# Altium PCB Neon-Demon-revB.PcbDoc
Units mm, origin at the board's own origin, x right, y up, seen from the top; angles counter-clockwise.
Board outline 24.14 x 27.04 mm, 2 copper layers (Top Layer, Bottom Layer), stack 1.071 mm thick; 10 components, 7 nets, 45 pads, 8 vias.
Unrouted connection lines stored in the file: 1.
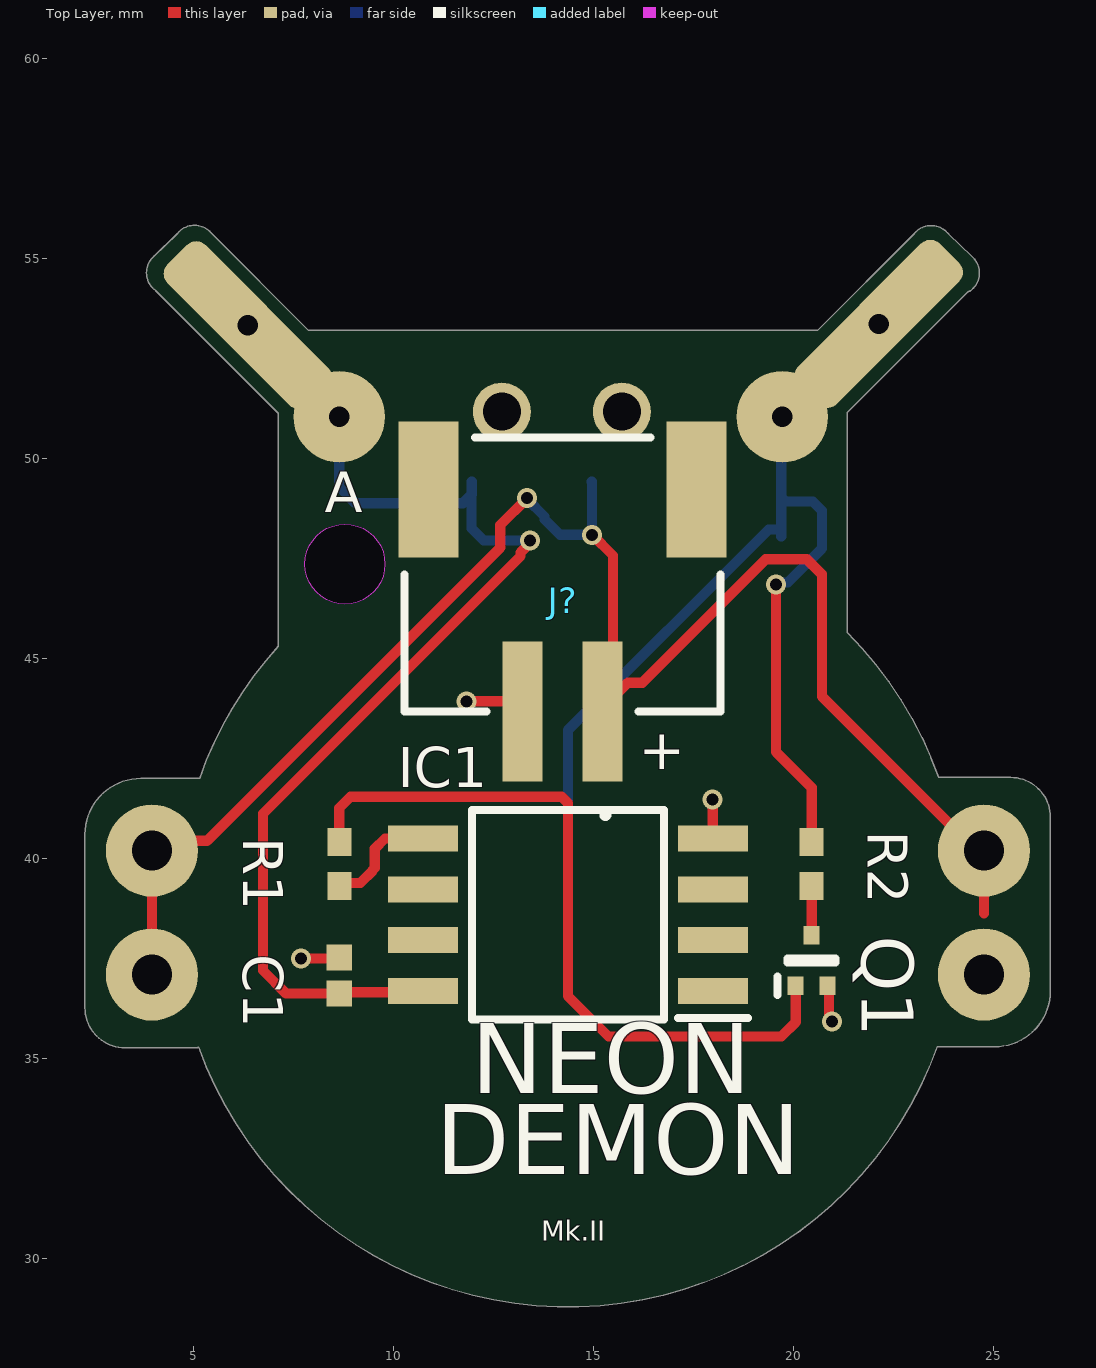
[diagram p0: Top Layer view]
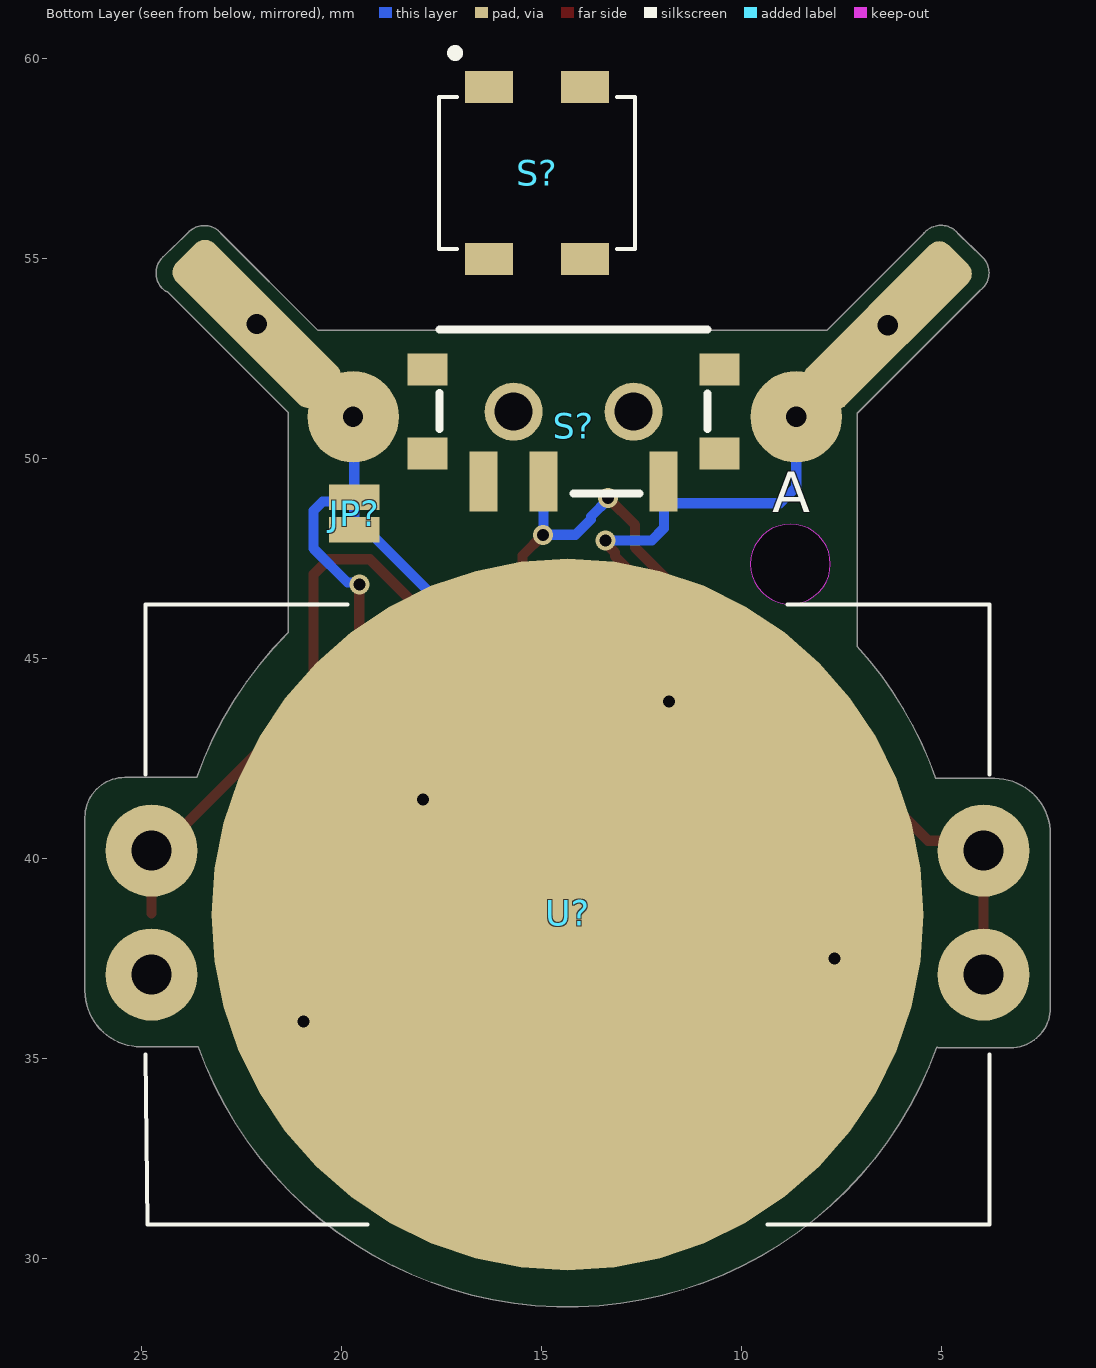
[diagram p1: Bottom Layer view, seen from below]
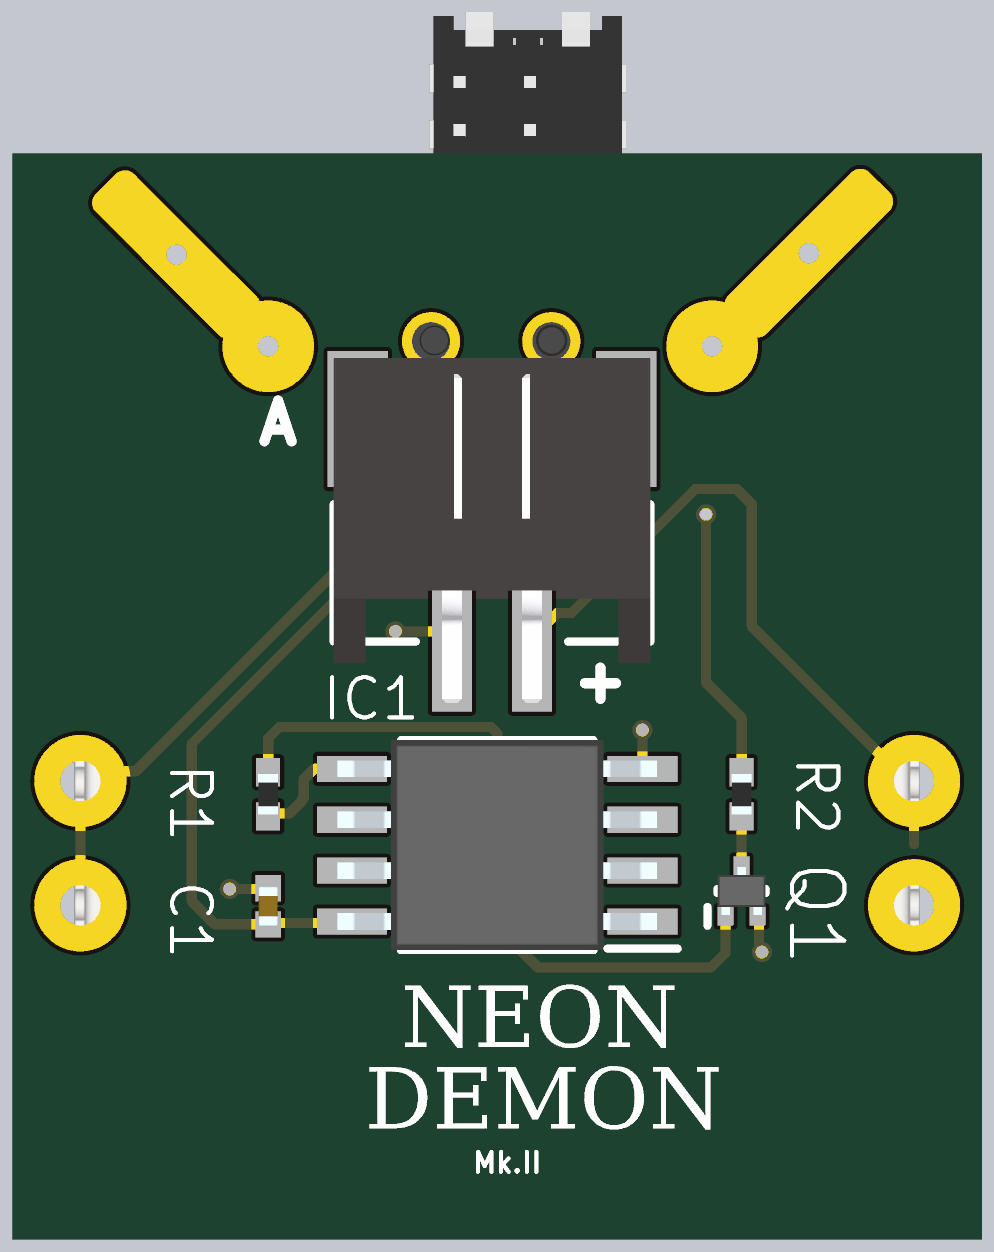
[diagram p2: 3D render of the assembled board from above, using the file's embedded part models]
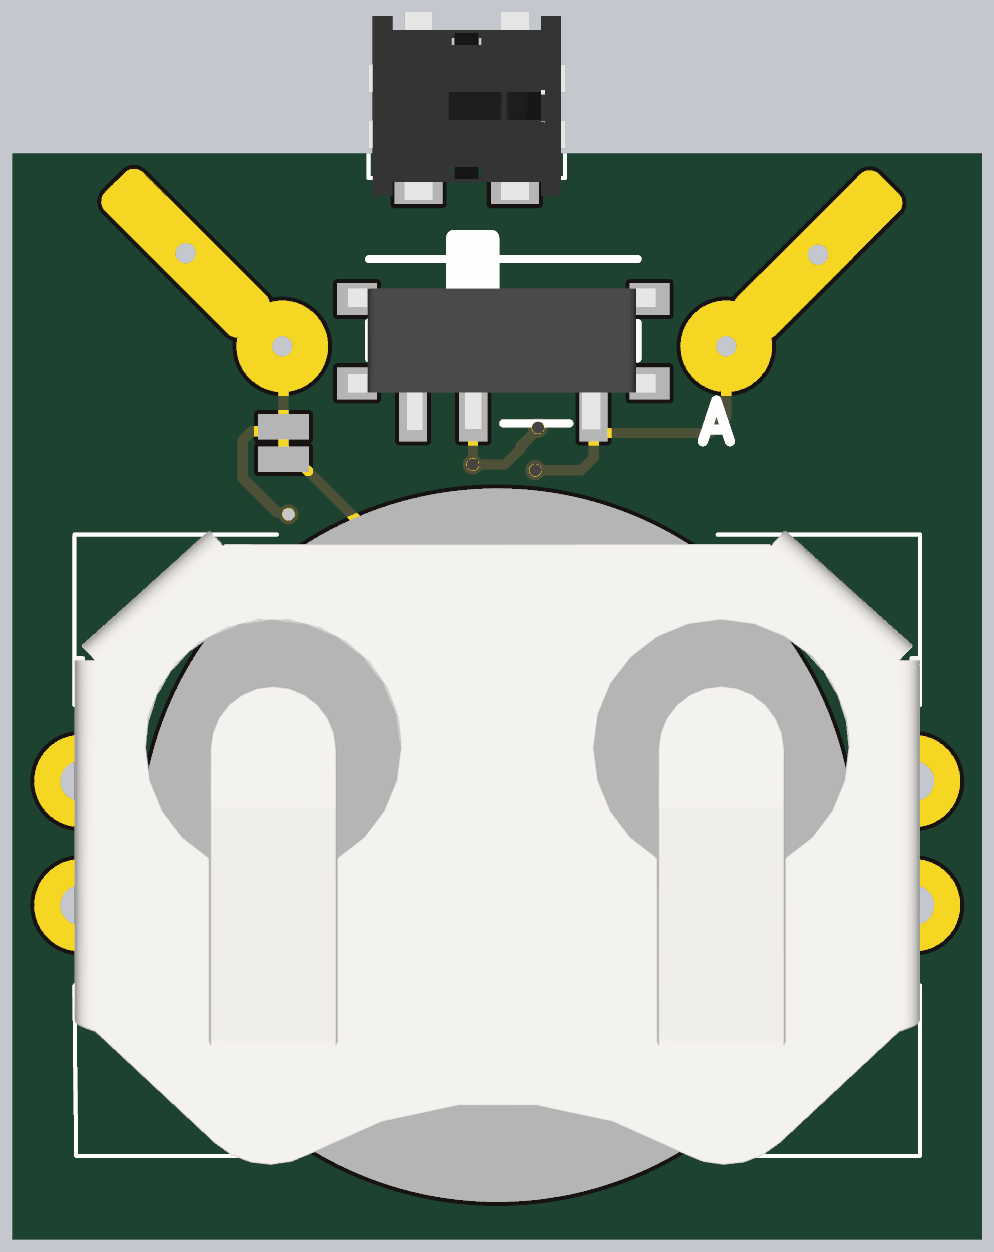
[diagram p3: 3D render of the assembled board from below, using the file's embedded part models]

## Layer stack, top to bottom
Top Solder: solder mask 0.0102, Solder Resist, Dk 3.5
Top Layer: signal copper 0.0356
Dielectric 1: dielectric 1, FR-4, Dk 4.8
Bottom Layer: signal copper 0.0356
Bottom Solder: solder mask 0.0102, Solder Resist, Dk 3.5

## Board outline
2.57,35.575 cw(c3.274,36.278) 2.279,36.278 2.279,40.618 cw(c3.677,40.618) 3.677,42.016 5.143,42.016 cw(c14.388,38.742) 7.113,45.319 cw(c7.239,45.339) 7.112,45.339 7.112,51.143 4.047,54.208 cw(c4.114,54.317) 4.038,54.214 cw(c4.365,54.656) 3.999,55.065 4.586,55.629 cw(c5.02,55.293) 5.432,55.657 cw(c5.337,55.573) 5.447,55.636 7.869,53.213 20.593,53.213 23.009,55.629 cw(c23.12,55.566) 23.024,55.65 cw(c23.436,55.286) 23.87,55.623 24.457,55.059 cw(c24.091,54.649) 24.641,54.649 cw(c24.091,54.649) 24.419,54.208 cw(c24.343,54.31) 24.355,54.183 21.336,51.165 21.336,45.662 cw(c14.388,38.742) 23.624,42.037 25.422,42.037 cw(c25.422,41.043) 26.125,41.746 cw(c25.422,41.043) 26.416,41.043 26.416,36.703 cw(c25.019,36.703) 25.019,35.306 23.585,35.306 cw(c14.351,38.608) 5.121,35.293 cw(c5.074,35.411) 5.074,35.284 3.274,35.284 cw(c3.274,36.278)
cut-out: 8.779,46.371 cw(c8.779,47.371) 7.779,47.371 cw(c8.779,47.371) 8.779,48.371 cw(c8.779,47.371) 9.779,47.371 cw(c8.779,47.371)

## Design rules (kind name [scope] priority, off if disabled: settings)
Clearance [All] p1: gap=0.254 ignorepadtopadclearanceinfootprint=FALSE except(0: Arc-Hole Track-Hole SMDPad-Hole THPad-Hole Via-Hole Fill-Hole Poly-Hole Region-Hole Text-Hole)
PolygonConnect [All] p1: connectstyle=Relief reliefconductorwidth=0.254 reliefentries=4 polygonreliefangle="90 Angle" airgapwidth=0.254
RoutingVias [All] p1: holewidth=0.711 width=1.27 viastyle="Through Hole" minholewidth=0.1 minwidth=0.1 maxholewidth=0.711 maxwidth=1.27
SolderMaskExpansion [All] p1: expansion=0.102 istentingtop=FALSE
Width [All] p1: maxlimit=0.254 minlimit=0.254 preferedwidth=0.254
30 further rules are at their usual default settings.

## Classes and differential pairs
component class Neon-Demon-revB: C1 IC1 J? JP? Q1 R1 R2 S? U?

## Components (designator, comment, footprint, x,y, rotation, side; value= is the part's Value field where it differs from the comment)
C1 "0402YC104MAT2A" CAPC1005X56N 8.636,37.084 r270 top
IC1 "ATTINY85-20SUR" SOIC127P798X216-8N 14.351,38.608 r180 top
J? "1769" 1769 14.22,43.688 r180 top
JP? "Normally open jumper    This jumper has two pads in close proximity to each other. Apply solder to close the connection.   Round pads are easier to solder for beginners, but are a lot larger.   SparkFun Product that uses the round pads:  SparkFun EL Sequencer" SMT-JUMPER_2_NO_SILK 19.685,48.641 r90 bottom
Q1 "MMBT2222AM3T5G" SOTFL40P120X55-3N 20.447,37.465 r90 top
R1 "CPF0402B100KE" RESC1005X35N 8.636,39.878 r90 top
R2 "CPF0402B100KE" RESC1005X35N 20.447,39.878 r90 top
S? "461011220101" 461011220101 15.113,57.15 r180 bottom
S? "CUS-12TB" CUS-12B 14.2,51.181 r0 bottom
U? "BAT-HLD-001-THM" BATHLD001THM 14.351,38.608 r0 bottom

## Footprints (in the part's own frame and the unit in brackets; to place one, negate y for a bottom-side part, rotate by r counter-clockwise, add the part's x,y. Pads: shape width x height; smd on the part's side, far side on the other; paste and mask are expansions set on the pad)
1769 [mm]
  rect 1x3.5 smd: 1(-1,0) 2(1,0)
  rect 1.5x3.4 smd: 3(-3.35,-5.55) 4(3.35,-5.55)
  silkscreen extent -3.95,-6.85 3.95,2.63, body extent -3.95,-7.07 3.95,1.53, height 4.8
461011220101 [mm]
  rect 1.2x0.8 smd: 1(-1.2,2.15) 2(1.2,2.15) 3(-1.2,-2.15) 4(1.2,-2.15)
  silkscreen extent -2.45,-1.9 2.45,3.05, body extent -2.45,-2.45 2.45,2.25, height 3.8
BATHLD001THM [mm]
  round 2.3 hole 1: 1(-10.4,1.5) 2(-10.4,-1.6) 3(10.4,-1.6) 4(10.4,1.5)
  round 17.8 smd: 5(0,0)
  silkscreen extent -10.55,-7.75 10.55,7.75, body extent -10.54,-7.85 10.54,7.98, height 4.29
CAPC1005X56N [mm]
  rect 0.65x0.64 smd: 1(-0.45,0) 2(0.45,0)
  body extent -0.5,-0.25 0.5,0.25, height 0.56
CUS-12B [mm]
  rect 0.7x1.5 smd: 1(-2.25,1.75) 2(0.75,1.75) 3(2.25,1.75)
  rect 1x0.8 smd: 4(3.65,1.05) 5(3.65,-1.05) 6(-3.65,-1.05) 7(-3.65,1.05)
  round 1.45 hole 0.95: 8(-1.5,0) 9(1.5,0)
  silkscreen extent -3.35,-2.05 3.35,2.05, body extent -3.8,-2.78 3.88,2.21, height 1.47
RESC1005X35N [mm]
  rect 0.7x0.6 smd: 1(-0.55,0) 2(0.55,0)
  body extent -0.5,-0.25 0.5,0.25, height 0.35
SMT-JUMPER_2_NO_SILK [mil]
  rect 25x50 smd paste+0: 1(-16,0) 2(16,0)
SOIC127P798X216-8N [mm]
  rect 1.75x0.65 smd: 1(-3.625,1.905) 2(-3.625,0.635) 3(-3.625,-0.635) 4(-3.625,-1.905) 5(3.625,-1.905) 6(3.625,-0.635) 7(3.625,0.635) 8(3.625,1.905)
  silkscreen extent -4.5,-2.62 2.4,2.62, body extent -3.99,-2.62 3.99,2.62, height 2.16
SOTFL40P120X55-3N [mm]
  rect 0.465x0.4 smd: 1(-0.632,0.4) 2(-0.632,-0.4) 3(0.632,0)
  silkscreen extent -0.86,-0.6 0.05,0.85, body extent -0.6,-0.6 0.6,0.6, height 0.55

## Part data
C1: "Capacitor", Manufacturer_Name=AVX, Mouser Part Number=581-0402YC104MAT2A, Datasheet Link=http://www.mouser.com/catalog/supplier/library/pdf/AVXSurfaceMountCeramic.pdf, Height=0.56mm, Manufacturer_Part_Number=0402YC104MAT2A, Mouser Price/Stock=https://www.mouser.co.uk/ProductDetail/AVX/0402YC104MAT2A?qs=O2%2FeDh0sX9yiCaLwpXy1bw%3D%3D
IC1: "Integrated Circuit", Manufacturer_Name=Microchip, Mouser Part Number=556-ATTINY85-20SUR, Arrow Part Number=ATTINY85-20SUR, Arrow Price/Stock=https://www.arrow.com/en/products/attiny85-20sur/microchip-technology?region=nac, Datasheet Link=http://ww1.microchip.com/downloads/en/DeviceDoc/Atmel-2586-AVR-8-bit-Microcontroller-ATtiny25-ATtiny45-ATtiny85_Datasheet.pdf, Height=2.16mm, Manufacturer_Part_Number=ATTINY85-20SUR, Mouser Price/Stock=https://www.mouser.co.uk/ProductDetail/Microchip-Technology/ATTINY85-20SUR?qs=6Dg1WZIWLC6UmR7J9f97hw%3D%3D
J?: "Connector", Manufacturer_Name=Adafruit, Mouser Part Number=485-1769, Arrow Part Number=1769, Arrow Price/Stock=https://www.arrow.com/en/products/1769/adafruit-industries?region=nac, Datasheet Link=https://cdn-shop.adafruit.com/datasheets/17311.pdf, Manufacturer_Part_Number=1769, Mouser Price/Stock=https://www.mouser.co.uk/ProductDetail/Adafruit/1769?qs=GURawfaeGuBbgoGtf2XstA%3D%3D
JP?: library part JUMPER-SMT_2_NO_SILK, Package=SMT-JUMPER_2_NO_SILK, DeviceName=_SILK, DeviceSetName=JUMPER-SMT_2_NO, GateName_1=G$1, LibraryName=SparkFun-Jumpers, SymbolName_1=SMT-JUMPER_2_NO
Q1: "Transistor BJT NPN", Manufacturer_Name=onsemi, Mouser Part Number=863-MMBT2222AM3T5G, Arrow Part Number=MMBT2222AM3T5G, Arrow Price/Stock=https://www.arrow.com/en/products/mmbt2222am3t5g/on-semiconductor?region=nac, Datasheet Link=http://www.onsemi.com/pub/Collateral/MMBT2222AM3-D.PDF, Height=0.55mm, Manufacturer_Part_Number=MMBT2222AM3T5G, Mouser Price/Stock=https://www.mouser.co.uk/ProductDetail/onsemi/MMBT2222AM3T5G?qs=N5dOQkml4H%252BwlTOlL9%2F4UA%3D%3D
R1 R2: "Resistor", Manufacturer_Name="TE Connectivity", Mouser Part Number=279-CPF0402B100KE, Arrow Part Number=CPF0402B100KE, Arrow Price/Stock=https://www.arrow.com/en/products/cpf0402b100ke/te-connectivity?region=nac, Datasheet Link=http://www.farnell.com/datasheets/1786775.pdf, Height=0.35mm, Manufacturer_Part_Number=CPF0402B100KE, Mouser Price/Stock=https://www.mouser.co.uk/ProductDetail/TE-Connectivity-Holsworthy/CPF0402B100KE?qs=CXI0wBT1M2h4W2Gm72yIGA%3D%3D
S?: "Switch", Manufacturer_Name="Wurth Elektronik", Mouser Part Number=710-461011220101, Datasheet Link=https://www.we-online.com/catalog/datasheet/461011220101.pdf, Height=3.8mm, Manufacturer_Part_Number=461011220101, Mouser Price/Stock=https://www.mouser.co.uk/ProductDetail/Wurth-Elektronik/461011220101?qs=wr8lucFkNMVAdVKd0FklHQ%3D%3D
S?: "Switch", Manufacturer_Name="Copal Electronics", Datasheet Link=http://www.nidec-copal-electronics.com/e/catalog/switch/cus.pdf, Manufacturer_Part_Number=CUS-12TB
U?: "Undefined or Miscellaneous", Manufacturer_Name="Linx Technologies", Mouser Part Number=712-BAT-HLD-001-THM, Datasheet Link="http://www.mouser.com/datasheet/2/238/BAT-HLD-001-THM Diagram-1175214.pdf", Height=4.2mm, Manufacturer_Part_Number=BAT-HLD-001-THM, Mouser Price/Stock=https://www.mouser.co.uk/ProductDetail/Linx-Technologies/BAT-HLD-001-THM?qs=Z0V%2FpEl%252BOGcluj3h2QTrDw%3D%3D

## Free pads (board coordinates)
  rrect50% 1.35x5 hole 0.508 rot 45: 1(6.35,53.34)
  round 2.286 hole 0.508: 1(8.636,51.054) 1(19.714,51.053)
  rrect50% 1.35x5 hole 0.508 rot 135: 1(22.125,53.376)

## Via types
v1: diameter 0.5, hole 0.3, Top Layer to Bottom Layer, tented both sides, 8 vias

## Nets (pads, with @x,y where several pads share a name; then routed paths per layer and width w, separated by ;. In a path a pad name is that pad's centre, name@x,y a point inside that pad or via, vN(x,y) a via of type N, cw(c..) or ccw(c..) an arc to the next point about the centre after c; other vN are vias at no path point)
GND: C1.1 IC1.4 J?.2 JP?.1 Q1.2 U?.5 | length 16.7
  Top Layer w0.254: v1(7.677,37.514) 8.616,37.514 C1.1 ; v1(11.811,43.942) 13.224,43.942 J?.2@13.478,43.688 ; v1(17.972,41.482) 17.972,40.517 IC1.4 ; Q1.2 20.882,36.798 20.882,36.081 20.955,36.008 v1(20.955,35.941)
  Bottom Layer w0.254: U?.5 14.351,43.218 19.367,48.235 JP?.1
LED_A: C1.2 IC1.8 pad.1@6.35,53.34 pad.1@8.636,51.054 S?.1@11.95,49.431 | length 25.9
  Top Layer w0.254: IC1.8 10.692,36.669 8.671,36.669 C1.2 7.308,36.634 6.731,37.211 6.731,41.134 13.17,47.573 13.17,47.665 13.402,47.897 v1(13.402,47.964)
  Bottom Layer w0.254: pad.1@8.636,51.054 8.636,49.298 9.039,48.895 11.727,48.895 S?.1@11.95,49.118 ; S?.1@11.95,49.431 S?.1@11.95,49.118 ; v1(13.402,47.964) 12.246,47.964 11.944,48.266 11.944,49.112 S?.1@11.95,49.118
LED_K: JP?.2 pad.1@19.714,51.053 pad.1@22.125,53.376 R2.2 | length 14.2
  Top Layer w0.254: v1(19.558,46.863) 19.558,42.672 20.449,41.781 R2.2@20.449,40.651
  Bottom Layer w0.254: v1(19.558,46.863) 19.605,46.91 19.852,46.91 20.701,47.759 20.701,48.71 20.478,48.933 19.799,48.933 JP?.2 19.685,51.024 pad.1@19.714,51.053 ; 19.685,48.069 pad.1@19.685,50.046
NetQ1_1: Q1.1 R1.2 | length 18.7
  Top Layer w0.254: R1.2 8.636,41.275 8.918,41.557 14.196,41.557 14.351,41.402 14.351,36.576 15.367,35.56 19.685,35.56 20.047,35.922 Q1.1
NetQ1_3: Q1.3 R2.1 | length 1.1
  Top Layer w0.254: Q1.3@20.447,38.227 R2.1
PWM: IC1.5 R1.1 | length 2.9
  Top Layer w0.254: R1.1 8.71,39.402 9.168,39.402 9.47,39.703 9.47,39.726 9.525,39.781 9.525,40.259 9.779,40.513 IC1.5
VBAT_RAW: J?.1 S?.2@14.95,49.431 U?.1 U?.2 U?.3 U?.4 | length 41.9
  Top Layer w0.254: U?.1 U?.2 4.197,40.454 5.333,40.454 12.662,47.783 12.662,48.349 v1(13.335,49.022) ; v1(14.961,48.105) 15.478,47.588 15.478,44.938 J?.1@15.478,43.688 ; J?.1@15.486,43.68 15.486,44.039 15.851,44.404 16.21,44.404 18.923,47.117 18.923,47.12 19.297,47.494 20.324,47.494 20.701,47.117 20.701,44.069 24.562,40.208 U?.3 24.751,38.639
  Bottom Layer w0.254: v1(13.335,49.022) 13.335,48.995 13.768,48.562 13.768,48.491 14.153,48.105 14.905,48.105 v1@14.933,48.077 ; S?.2@14.95,49.431 14.955,49.426 14.955,48.11 v1(14.961,48.105)
pads on no net: IC1.1 IC1.2 IC1.3 IC1.6 IC1.7 J?.3 J?.4 S?.1@16.313,59.3 S?.2@13.913,59.3 S?.3 S?.4 S?.5 S?.6 S?.7 S?.8 S?.9

## Silkscreen, mask and mechanical layers (free items; w line width, h text height)
Top Overlay:
  text "A" at 8.279,48.672 h1.02
  text "+" at 16.129,42.249 h1.02
  text "NEON" at 11.938,33.572 h3
  text "DEMON" at 11.049,31.54 h3
  text "Mk.II" at 13.689,30.453 h0.5
Bottom Overlay:
  text "A" at 8.279,48.672 h1.02
Mechanical 1:
  lines w0.254: 9.18,51.855 cw(c9.18,51.891) 9.144,51.891 9.144,54.102 cw(c9.779,54.102) 9.779,54.737 18.542,54.737 18.796,54.737 cw(c18.796,54.229) 19.304,54.229 19.304,51.891
Board Shape:
  circle w0.254: c8.763,47.371 r1
  lines w0.254: 4.095,54.34 7.239,51.196 7.239,49.276 ; 4.114,54.317 cw(c4.365,54.656) 4.086,54.972 4.681,55.545 cw(c5.02,55.293) 5.337,55.573 ; 5.074,35.411 3.274,35.411 cw(c3.274,36.278) 2.661,35.665 cw(c3.274,36.278) 2.407,36.278 2.407,36.554 2.407,40.618 cw(c3.677,40.618) 3.677,41.888 5.201,41.888 ; 5.216,35.407 ccw(c14.351,38.608) 23.491,35.423 ; 5.23,41.878 cw(c14.388,38.742) 7.246,45.276 ; 5.313,55.59 7.817,53.086 8.509,53.086 20.632,53.086 ; 7.239,45.339 7.239,50.038 ; 20.639,53.079 23.144,55.584 ; 21.205,45.613 cw(c14.388,38.742) 23.523,41.943 ; 21.209,45.626 21.209,51.217 24.325,54.333 24.361,54.333 ; 23.12,55.566 cw(c23.436,55.286) 23.775,55.538 24.371,54.965 cw(c24.091,54.649) 24.343,54.31 ; 23.495,35.433 25.019,35.433 ccw(c25.019,36.703) 26.289,36.703 26.289,40.767 26.289,41.043 ccw(c25.422,41.043) 26.035,41.656 ccw(c25.422,41.043) 25.422,41.91 23.622,41.91
Mechanical 7:
  region: 5.969,52.29 7.383,53.704 5.969,55.118 4.555,53.704
  lines w0.254: 2.017,38.648 27.036,38.648 ; 4.699,54.991 8.636,51.054
Mechanical 13:
  lines w0.254: 14.224,24.257 14.224,38.608 14.224,55.118